# EAGLE board refPhotoDiode (EAGLE 8.6.0)
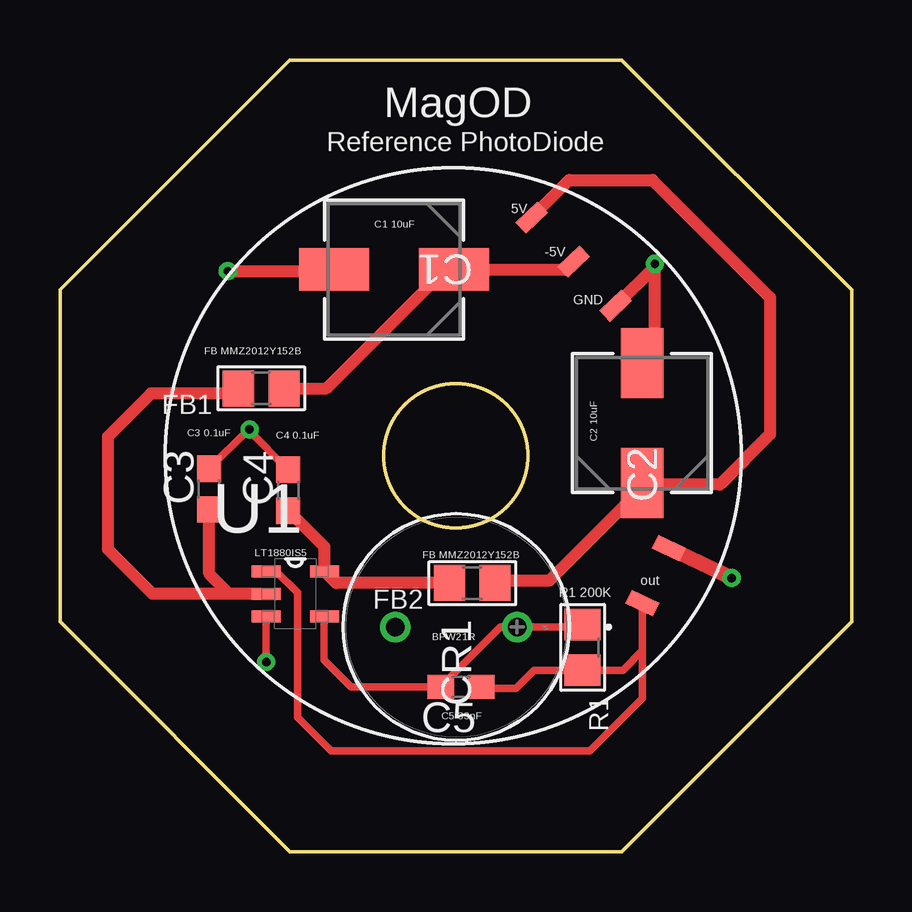
[diagram p0: board, top side]
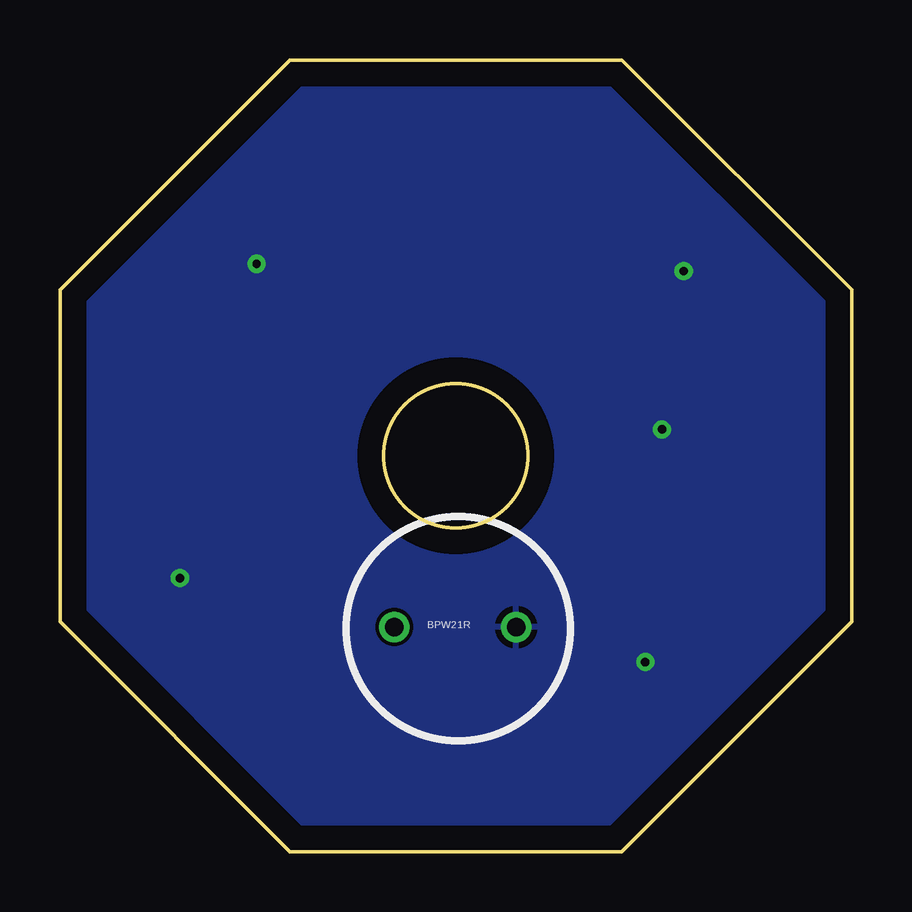
[diagram p1: board, bottom side, seen from below]

Size 33 x 33.02 mm. Coordinates in mm from the lower left corner, seen from the top.
Outline: 9.6,33.02 9.57,33.02 0,23.45 0,9.62
Outline: 9.6,33.02 23.4,33.02
Outline: 23.4,33.02 23.43,33.02 33,23.45 33,23.42
Outline: 23.43,0 9.57,0
Outline: 0,9.62 0,9.59 9.57,0.02
Outline: 33,9.62 33,9.59 23.43,0.02
Outline: 9.6,33.02 23.4,33.02
Outline: 23.4,33.02 33,23.42
Outline: 33,23.42 33,9.62
Outline: 33,9.62 23.4,0.02 9.6,0.02 0,9.62
Outline: circle at 16.5,16.52 radius 3
Copper layers (1*16): Top 0.035mm / dielectric 1.5mm / Bottom 0.035mm
Design rules "default": minimum track width 6mil, minimum drill 0.35mm, track to track 6mil, track to pad 6mil, pad to pad 6mil, via to via 6mil, smd to smd 6mil, copper to edge 40mil, drill to drill 6mil, minimum pad ring 10mil, minimum via ring 8mil, stop-mask expansion 4mil, vias tented up to drill 0mil, thermal gap 10mil

## Footprints (pad centres in the part's own frame; a part is rotated, then mirrored left to right if it is on the bottom)
CAP_EEFC_C = smd 2.921 x 1.778: 1 -2.502,0; 2 2.502,0
C0603 = smd 1.1 x 1: 1 -0.85,0; 2 0.85,0
TO99_BPW20RF = drill 0.762 pad 1.27: 1 0,-5.08; 2 0,0
0805 = smd 1.3 x 1.5: 1 -0.95,0; 2 0.95,0
22-28-8020 = smd 0.635 x 1.27: 1 1.27,0; 2 -1.27,0
SOT95P280X100-5N = smd 1.219 x 0.508: 1 -1.219,0.94; 2 -1.219,0; 3 -1.219,-0.94; 4 1.219,-0.94; 5 1.219,0.94
PINHD_SMD-3 = smd 0.635 x 1.27: 1 -2.54,0; 2 0,0; 3 2.54,0

## Placement (x,y rotation side)
C1  EEEFC1V100R  [CAP_EEFC_C]  13.93,24.29 180 top
C2  EEEFC1V100R  [CAP_EEFC_C]  24.27,17.88 90 top
C3  0.1uF  [C0603]  6.22,15.13 90 top
C4  0.1uF  [C0603]  9.52,15.08 90 top
C5  2.2nF  [C0603]  16.72,6.89 180 top
CR1  BPW21R  [TO99_BPW20RF]  13.98,9.38 90 top
FB1  MMZ2012Y152B  [0805]  8.39,19.33 180 top
FB2  MMZ2012Y152B  [0805]  17.19,11.21 180 top
J2  22-28-8020  [22-28-8020]  24.83,11.52 244.5 top
R1  200K  [0805]  21.79,8.53 270 top
U1  LT1880IS5TRMPBF  [SOT95P280X100-5N]  9.81,10.76 0 top
U$2  PINHD_SMD-3  [PINHD_SMD-3]  21.41,24.61 313.6 top

## Library data of the parts
C1 C2 = 10uFElectrolyticSMD; MANUFACTURER_PART_NUMBER: EEEFC1V100R; VENDOR: Panasonic
C3-C5 = rcl; SPICEPREFIX: C
CR1 = BPW21R; MANUFACTURER_PART_NUMBER: BPW21R; VENDOR: Vishay
FB1 FB2 R1 = microbuilder
J2 = PinHD-2; MANUFACTURER_PART_NUMBER: 22288020; VENDOR: Molex Connector Corporation
U1 = LT1880IS5; DESCRIPTION: Ic Opamp Pico/In Rr/Out Tsot23-5 - Lt1880is5#Trmpbf; DIGI-KEY_PART_NUMBER: LT1880IS5#TRMPBFCT-ND; DIGI-KEY_PURCHASE_URL: https://www.digikey.com/product-detail/en/linear-technology-analog-devices/LT1880IS5-TRMPBF/LT1880IS5-TRMPBFCT-ND/890504?WT.z_cid=ref_snapeda&utm_source=snapeda&utm_medium=aggregator&utm_campaign=buynow; MF: Linear Technology; MP: LT1880IS5#TRMPBF; PACKAGE: TSOT-23 Linear Technology
U$2 = PINHD_SMD-3

## Nets
5V: C2.1 FB2.1 U$2.1
-5V: C1.1 FB1.1 U$2.2
GND_ANALOG: C1.2 C2.2 C3.2 C4.2 CR1.2 J2.2 U1.3 U$2.3
N$14: C5.1 J2.1 R1.2 U1.1
N$17: C5.2 CR1.1 R1.1 U1.4
V+(5V): C4.1 FB2.2 U1.5
V-(-5V): C3.1 FB1.2 U1.2

## Tracks (layer width: path | path; a pad name or v marks a point on that pad's centre or on a via)
5V
  Top 0.508: 24.16,15.38 C2.1 24.33,15.32 24.4,15.32 | U$2.1 21.23,28.02 24.7,28.02 29.6,23.12 29.6,17.42 27.5,15.32 24.7,15.32 24.4,15.32 | FB2.1 18.25,11.32 20.4,11.32 24.4,15.32
-5V
  Top 0.508: U$2.2 21.09,24.29 C1.1 16.07,24.29 11.11,19.33 FB1.1
GND_ANALOG  (via drill 0.35)
  Top 0.305: v8.6,7.92 v8.59,7.93 U1.3 | C3.2 7.86,17.62 | 7.86,17.62 v7.9,17.62 | C4.2 7.86,17.59 7.86,17.62
  Top 0.508: C2.2 24.8,20.91 v24.8,24.52 24.8,24.41 U$2.3 | 7.02,24.2 v7,24.22 11.36,24.22 C1.2
  Top 0.61: v28,11.42 J2.2
  pour Bottom: 9.6,33.02 23.4,33.02 33,23.42 33,9.52 23.5,0.02 23.4,0.02 9.6,0.02 0,9.62 0,9.72 0,23.32 0,23.42
N$14
  Top 0.305: U1.1 9.02,11.7 9.9,10.82 9.9,5.62 11.3,4.22 22.1,4.22 24.28,6.4 24.28,8.4 | J2.1 24.28,8.4 | 24.28,8.4 23.46,7.58 R1.2 19.76,7.58 19,6.82 17.64,6.82 C5.1
N$17
  Top 0.305: R1.1 21.69,9.38 CR1.1 18.36,9.38 C5.2 12.13,6.89 11,8.02 11,9.79 U1.4
V+(5V)
  Top 0.508: C4.1 11.03,12.72 U1.5 11.52,11.21 FB2.2
V-(-5V)
  Top 0.508: U1.2 7.06,10.76 | C3.1 6.22,11.6 7.06,10.76 | FB1.2 7.23,19.12 3.8,19.12 2,17.32 2,12.62 3.86,10.76 7.06,10.76

## Text on the board
tPlace: MagOD | Reference PhotoDiode | C1 10uF | 5V | -5V | GND | FB MMZ2012Y152B | C3 0.1uF | C4 0.1uF | C2 10uF | LT1880IS5 | FB MMZ2012Y152B | out | R1 200K | BPW21R | C5 33nF
bPlace: BPW21R